# Altium PCB EmergencyIsolator.PcbDoc
Units mm, origin at the board's own origin, x right, y up, seen from the top; angles counter-clockwise.
Board outline 70 x 80 mm, 2 copper layers (Top Layer, Bottom Layer); 75 components, 75 nets, 274 pads, 29 vias.
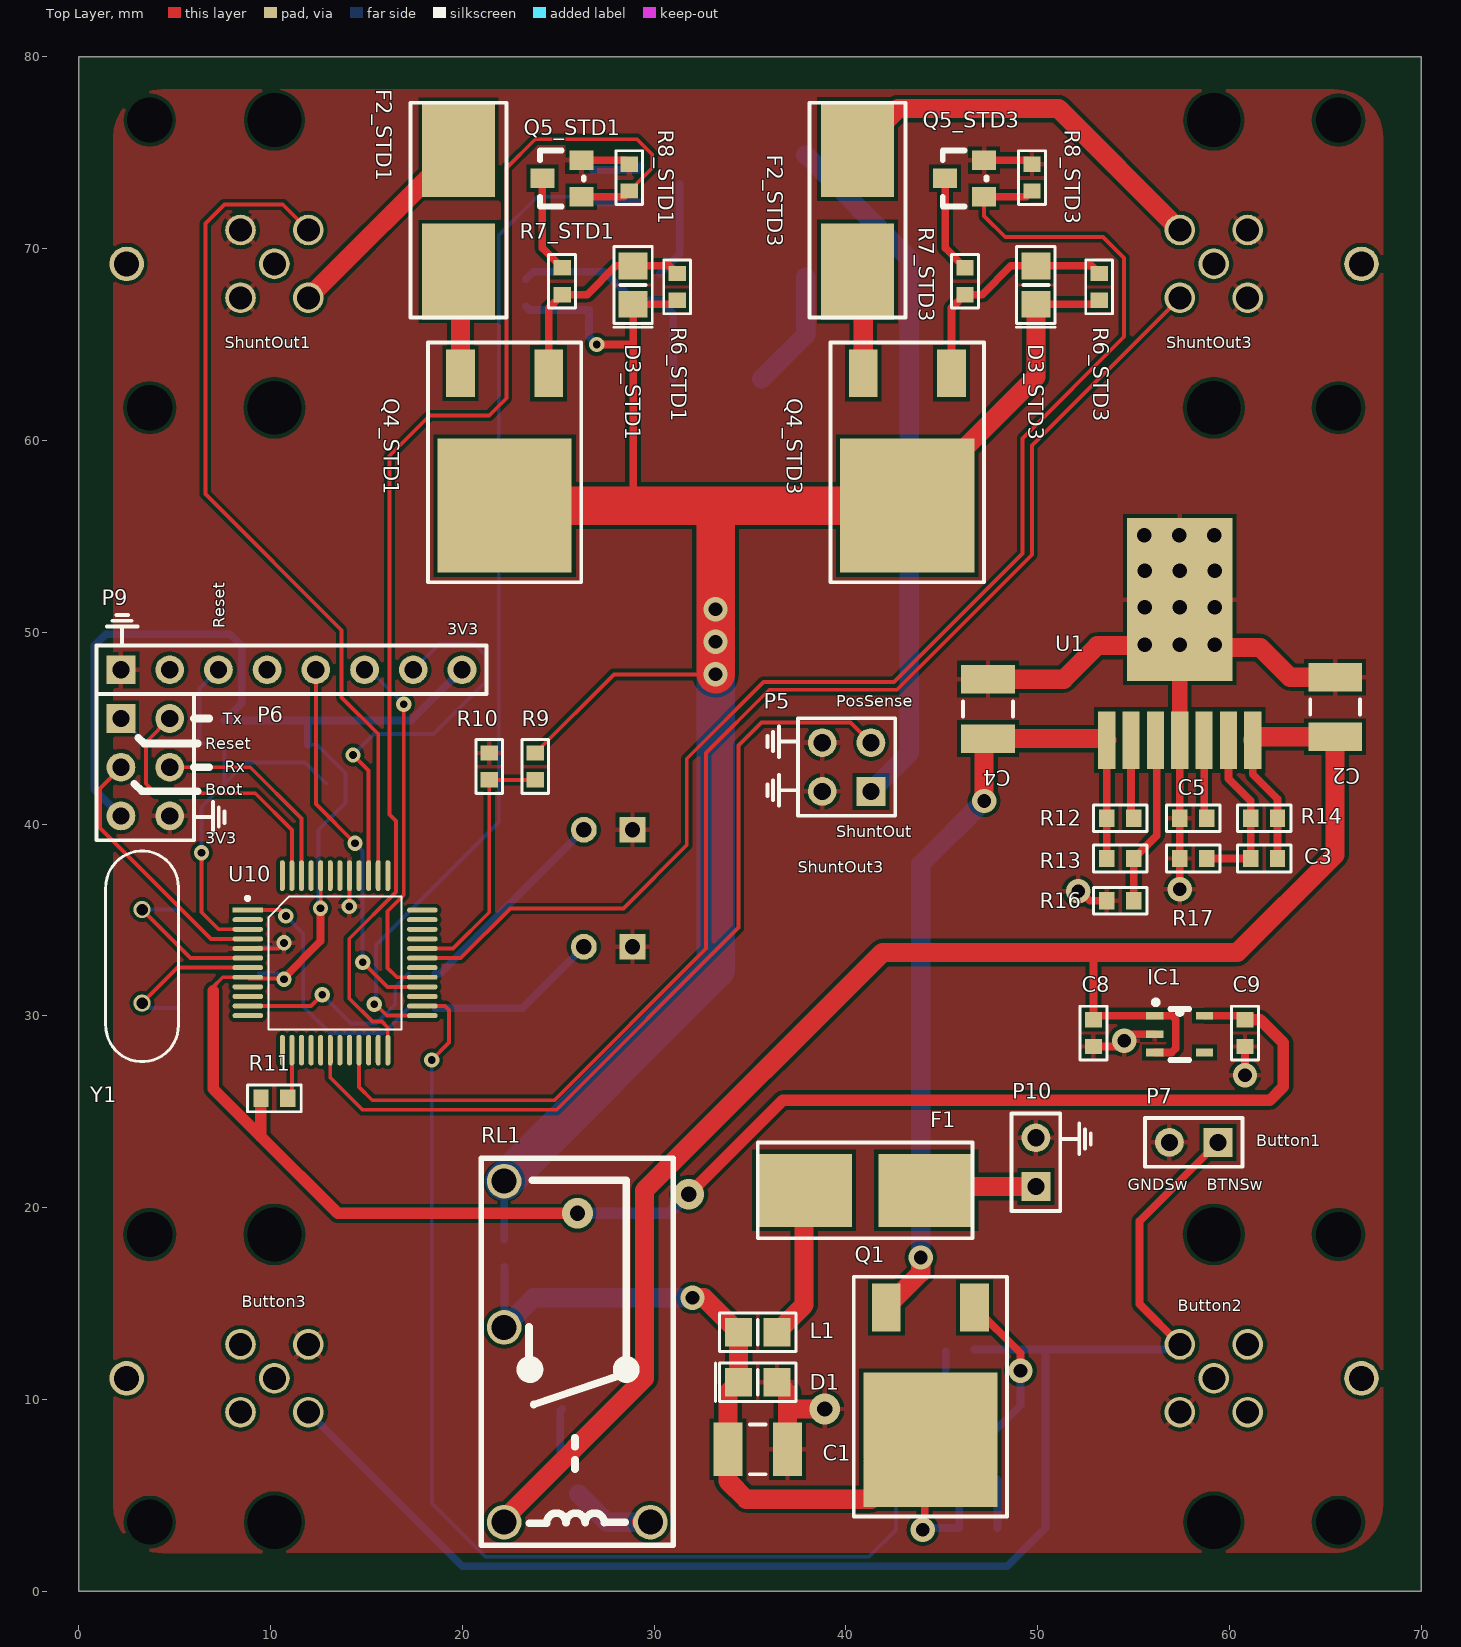
[diagram p0: Top Layer view]
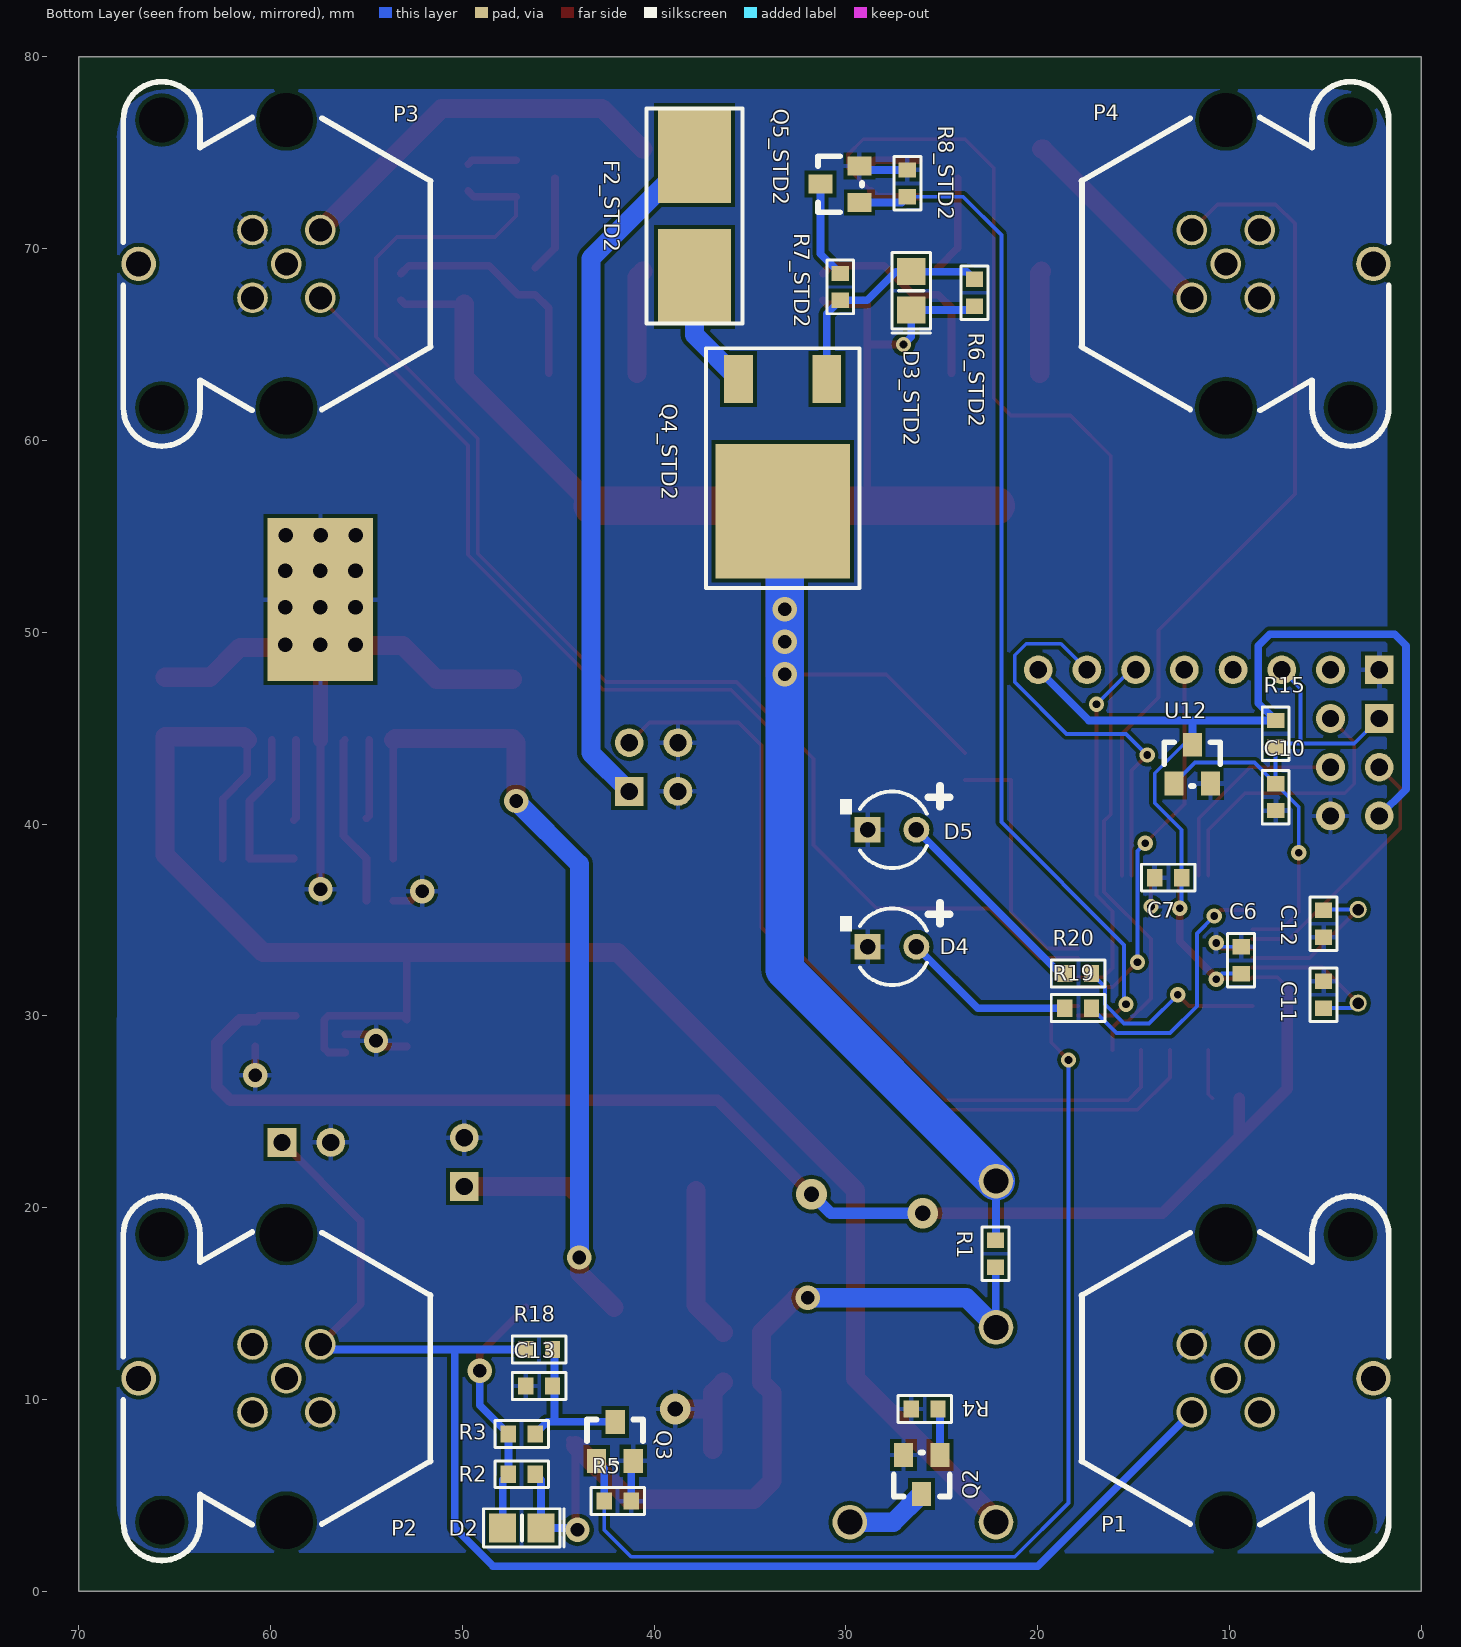
[diagram p1: Bottom Layer view, seen from below]
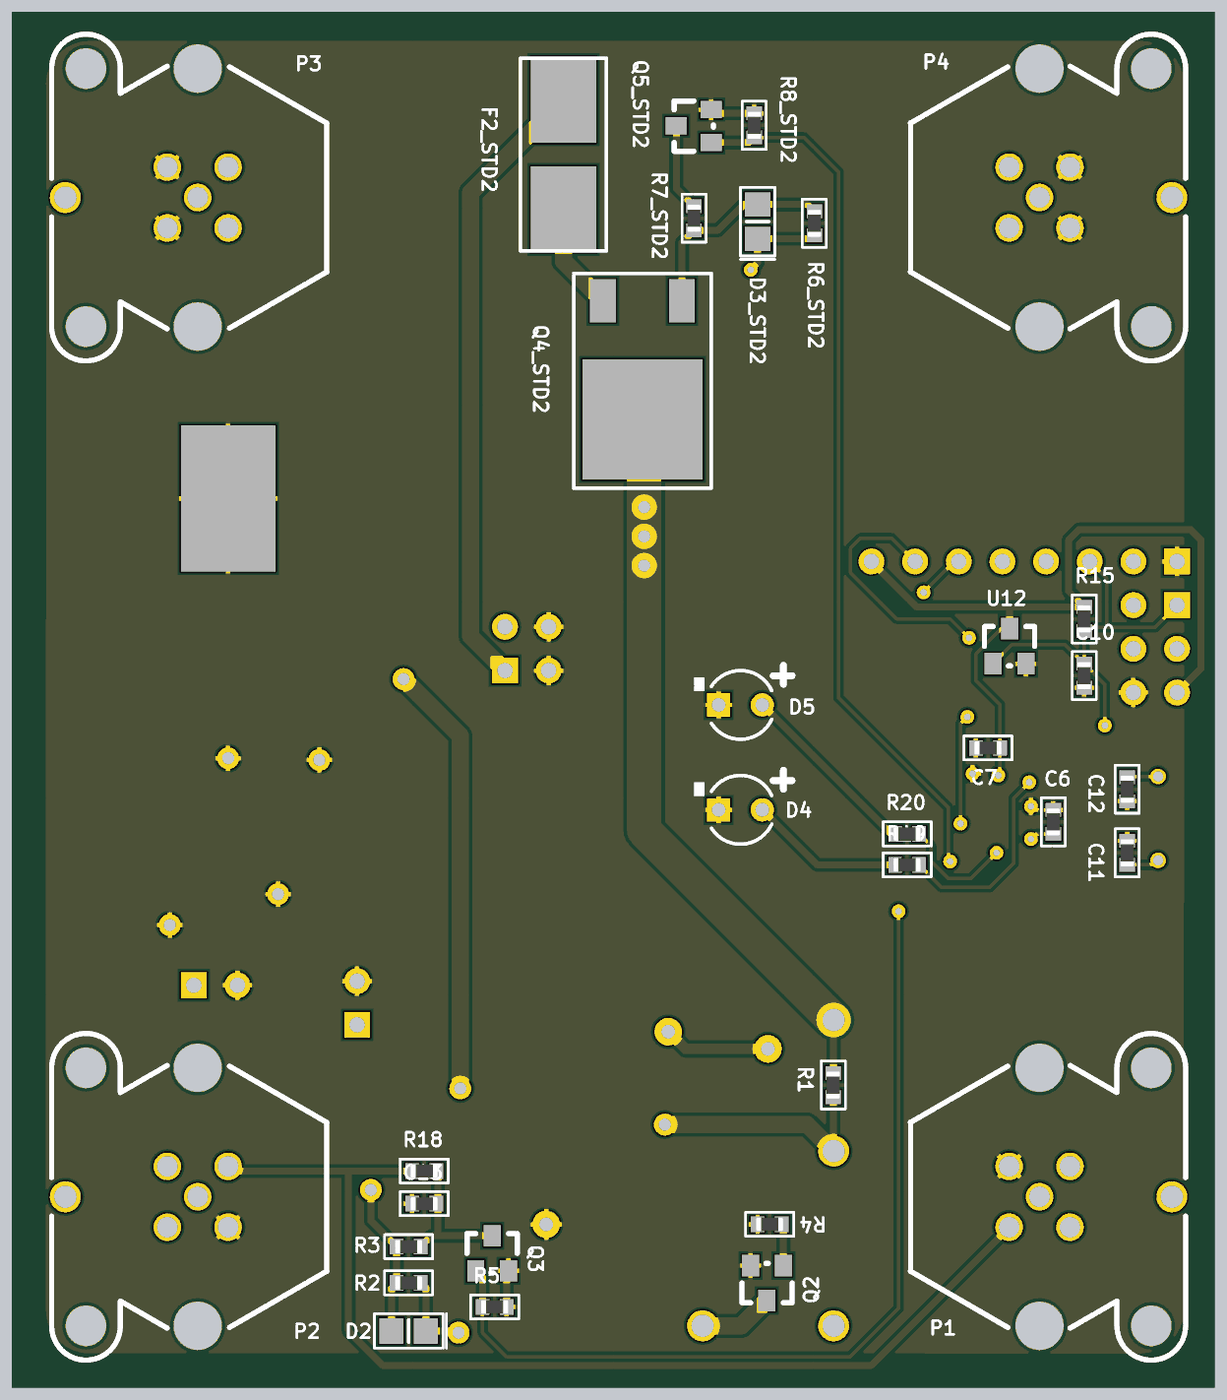
[diagram p2: 3D render of the assembled board from below, using the file's embedded part models]

## Layer stack, top to bottom
Top Layer: signal copper 0.0356
Dielectric: dielectric 0.32, FR-4, Dk 4.8
Bottom Layer: signal copper 0.0356

## Board outline
0,0 0,80 70,80 70,0

## Design rules (kind name [scope] priority, off if disabled: settings)
Clearance [All] p1: gap=0.2
PolygonConnect [All] p1: connectstyle=Relief reliefconductorwidth=0.254 reliefentries=4 polygonreliefangle="90 Angle"
RoomDefinition STD3 [InComponentClass('STD3')] p1 off: confinementstyle=ConfineIn formatcopy=TRUE lockcomponents=FALSE outline -77.9,-40 -27.1,-40 -27.1,-14.6 -77.9,-14.6
RoomDefinition STD2 [InComponentClass('STD2')] p2 off: confinementstyle=ConfineIn formatcopy=TRUE lockcomponents=FALSE outline -77.9,-40 -27.1,-40 -27.1,-14.6 -77.9,-14.6
RoomDefinition STD1 [InComponentClass('STD1')] p3 off: confinementstyle=ConfineIn formatcopy=TRUE lockcomponents=FALSE outline -77.9,-40 -27.1,-40 -27.1,-14.6 -77.9,-14.6
RoomDefinition PowerSupply [InComponentClass('PowerSupply')] p4 off: confinementstyle=ConfineIn formatcopy=TRUE lockcomponents=FALSE outline -70.9,-25 -20.1,-25 -20.1,0.4 -70.9,0.4
RoomDefinition Microcontroller [InComponentClass('Microcontroller')] p5 off: confinementstyle=ConfineIn formatcopy=TRUE lockcomponents=FALSE outline -70.9,-25 -20.1,-25 -20.1,0.4 -70.9,0.4
RoomDefinition IsolatorTop [InComponentClass('IsolatorTop')] p6 off: confinementstyle=ConfineIn formatcopy=TRUE lockcomponents=FALSE outline -70.9,-25 -20.1,-25 -20.1,0.4 -70.9,0.4
RoomDefinition IsolatorPower [InComponentClass('IsolatorPower')] p7 off: confinementstyle=ConfineIn formatcopy=TRUE lockcomponents=FALSE outline -70.9,-25 -20.1,-25 -20.1,0.4 -70.9,0.4
RoutingVias [All] p1: holewidth=0.4 width=0.8 viastyle="Through Hole" minholewidth=0.2 minwidth=0.4 maxholewidth=1 maxwidth=1.6
SilkToSilkClearance [All] p1 off: silktosilkclearance=0.254
SilkscreenOverComponentPads [All] p1 off: minsilkscreentomaskgap=0.254
SolderMaskExpansion [All] p1: expansion=0.102
Width [All] p1: maxlimit=4 minlimit=0.2 preferedwidth=0.3
26 further rules are at their usual default settings.

## Classes and differential pairs
component class Microcontroller: C6 C7 C10 C11 C12 J10 P6 P9 R11 R15 U10 U12 Y1 Y10
net class SHUNTOUT[1..3]: SHUNTOUT1 SHUNTOUT2 SHUNTOUT3
net class SHUNTDRIVE[1..3]: SHUNTDRIVE1 SHUNTDRIVE2 SHUNTDRIVE3
component class PowerSupply: C2 C3 C4 C5 C8 C9 IC1 R12 R13 R14 R16 R17 U1
component class IsolatorTop: D4 D5 P3 P4 P5 R9 R10 R19 R20
component class IsolatorPower: C1 C13 D1 D2 F1 L1 P1 P2 P7 P10 Q1 Q2 Q3 R1 R2 R3 R4 R5 R18 RL1
component class STD1: D3_STD1 F2_STD1 Q4_STD1 Q5_STD1 R6_STD1 R7_STD1 R8_STD1
component class STD2: D3_STD2 F2_STD2 Q4_STD2 Q5_STD2 R6_STD2 R7_STD2 R8_STD2
component class STD3: D3_STD3 F2_STD3 Q4_STD3 Q5_STD3 R6_STD3 R7_STD3 R8_STD3
channel class ShuntTripDriver: STD1 STD2 STD3

## Components (designator, comment, footprint, x,y, rotation, side; value= is the part's Value field where it differs from the comment)
C1 "C" 1210_M 35.4,7.4 r0 top
C2 "C" 1210_M 65.5,46.1 r90 top
C3 "C" 0603_M 61.8,38.2 r0 top
C4 "C" 1210_M 47.4,46 r90 top
C5 "C" 0603_M 58.1,40.3 r180 top
C6 "C" 0603_M 9.4,32.9 r90 bottom
C7 "C" 0603_M 13.2,37.2 r0 bottom
C8 "C" 0603_M 52.9,29.1 r270 top
C9 "C" 0603_M 60.8,29.1 r270 top
C10 "C" 0603_M 7.6,41.4 r270 bottom
C11 "C" 0603_M 5.1,31.1 r270 bottom
C12 "C" 0603_M 5.1,34.8 r270 bottom
C13 "C" 0603_M 46,10.7 r0 bottom
D1 "" 0805_M_POL 35.4,10.9 r180 top
D2 "" 0805_M_POL 46.9,3.3 r180 bottom
D3_STD1 "" 0805_M_POL 28.9,68.1 r270 top (schematic designator D3)
D3_STD2 "" 0805_M_POL 26.6,67.8 r270 bottom (schematic designator D3)
D3_STD3 "" 0805_M_POL 49.9,68.1 r270 top (schematic designator D3)
D4 "LED" CAP_0.1_POL 27.6,33.6 r180 bottom
D5 "LED" CAP_0.1_POL 27.6,39.7 r180 bottom
F1 "10A Fuse" LITTELFUSE-154 41,20.9 r180 top
F2_STD1 "5A Fuse" LITTELFUSE-154 19.8,72 r90 top (schematic designator F2)
F2_STD2 "5A Fuse" LITTELFUSE-154 37.9,71.7 r90 bottom (schematic designator F2)
F2_STD3 "5A Fuse" LITTELFUSE-154 40.6,72 r90 top (schematic designator F2)
IC1 "3.3V Regulator" SOT23-5 56.1,30 r270 top
L1 "value" 0805_M 35.4,13.5 r180 top
P1 "M12 Connector" M12_5P_VERT 10.2,11.1 r90 bottom
P2 "M12 Connector" M12_5P_VERT 59.175,11.1 r270 bottom
P3 "M12 Connector" M12_5P_VERT 59.175,69.2 r270 bottom
P4 "M12 Connector" M12_5P_VERT 10.2,69.2 r90 bottom
P5 "Header 2X2" HDR2X2 41.3,41.7 r90 top
P6 "Header 3X2" HDR2X3 2.2,45.5 r270 top
P7 "Header 2" HDR1X2 59.4,23.4 r180 top
P9 "Header 8" HDR1X8 2.2,48.04 r0 top
P10 "Header 2" HDR1X2 49.9,21.1 r90 top
Q1 "PFET 40V 10A" "TO-252 (D-Pak)" 44.4,7.9 r180 top
Q2 "50V N-Fet" SOT23-3 25.1,7.1 r0 bottom
Q3 "NFET 30V 5A" SOT23-3 43,6.8 r180 bottom
Q4_STD1 "PFET 40V 10A" "TO-252 (D-Pak)" 22.2,56.6 r180 top (schematic designator Q4)
Q4_STD2 "PFET 40V 10A" "TO-252 (D-Pak)" 33.3,56.3 r0 bottom (schematic designator Q4)
Q4_STD3 "PFET 40V 10A" "TO-252 (D-Pak)" 43.2,56.6 r180 top (schematic designator Q4)
Q5_STD1 "NFET 30V 5A" SOT23-3 26.2,72.7 r90 top (schematic designator Q5)
Q5_STD2 "NFET 30V 5A" SOT23-3 29.3,72.4 r90 bottom (schematic designator Q5)
Q5_STD3 "NFET 30V 5A" SOT23-3 47.2,72.7 r90 top (schematic designator Q5)
R1 "R" 0603_M 22.2,17.6 r270 bottom
R2 "R" 0603_M 46.9,6.1 r180 bottom
R3 "R" 0603_M 46.9,8.2 r0 bottom
R4 "R" 0603_M 25.9,9.5 r180 bottom
R5 "R" 0603_M 41.9,4.7 r0 bottom
R6_STD1 "R" 0603_M 31.2,68 r270 top (schematic designator R6)
R6_STD2 "R" 0603_M 23.3,67.7 r270 bottom (schematic designator R6)
R6_STD3 "R" 0603_M 53.2,68 r270 top (schematic designator R6)
R7_STD1 "R" 0603_M 25.2,68.3 r270 top (schematic designator R7)
R7_STD2 "R" 0603_M 30.3,68 r270 bottom (schematic designator R7)
R7_STD3 "R" 0603_M 46.2,68.3 r270 top (schematic designator R7)
R8_STD1 "R" 0603_M 28.7,73.7 r270 top (schematic designator R8)
R8_STD2 "R" 0603_M 26.8,73.4 r270 bottom (schematic designator R8)
R8_STD3 "R" 0603_M 49.7,73.7 r270 top (schematic designator R8)
R9 "R" 0603_M 23.8,43 r270 top
R10 "R" 0603_M 21.4,43 r90 top
R11 "R" 0603_M 10.2,25.7 r180 top
R12 "R" 0603_M 54.3,40.3 r180 top
R13 "R" 0603_M 54.3,38.2 r180 top
R14 "R" 0603_M 61.8,40.3 r0 top
R15 "R" 0603_M 7.6,44.7 r90 bottom
R16 "R" 0603_M 54.3,36 r0 top
R17 "R" 0603_M 58.1,38.2 r0 top
R18 "R" 0603_M 46,12.6 r0 bottom
R19 "R" 0603_M 17.9,30.4 r180 bottom
R20 "R" 0603_M 17.9,32.2 r180 bottom
RL1 "Relay" RELAY_G5Q_4PIN 29.8,3.6 r90 top
U1 "LMZ12001" LMZ12001 57.4,44.4 r0 top
U10 "LPC11C14" QFP48 8.8,35.5 r0 top
U12 "XC61CN2002MR" SOT23-3 12.9,42.1 r180 bottom
Y1 "XTAL-16MHz" XTAL_TH_4.88MM 3.3,33.1 r270 top

## Footprints (in the part's own frame and the unit in brackets; to place one, negate y for a bottom-side part, rotate by r counter-clockwise, add the part's x,y. Pads: shape width x height; smd on the part's side, far side on the other; paste and mask are expansions set on the pad)
0603_M [mm] "Passive Component, Body 1.6x0.8mm, IPC Low Density"
  rect 0.8x0.9 smd: 1(-0.7,0) 2(0.7,0)
  silkscreen extent -1.4,-0.7 1.4,0.7, body extent -0.8,-0.4 0.8,0.4, height 0.9
0805_M [mm] "Passive Component, Body 2.0x1.2mm, IPC Low Density"
  rect 1.4x1.5 smd: 1(-1,0) 2(1,0)
  silkscreen extent -2,-1 2,1, body extent -1,-0.62 1,0.62, height 1.2
0805_M_POL [mm] "Passive Component, Body 2.0x1.2mm, IPC Low Density, polarised"
  rect 1.4x1.5 smd: 1(-1,0) 2(1,0)
  silkscreen extent -2,-1 2.2,1, body extent -1.07,-0.7 1.07,0.7, height 0.7
1210_M [mm] "Chip Capacitor, Body 3.2x2.5mm, IPC Low Density"
  rect 1.5x2.8 smd: 1(-1.55,0) 2(1.55,0)
  silkscreen extent -0.4,-1.3 0.4,1.3, body extent -1.7,-1.35 1.7,1.35, height 1.5
CAP_0.1_POL [mm] "Capacitor; 2 Leads, 0.1\" spacing, polarisation marker"
  round 1.35 hole 0.8: 1(1.27,0)
  rect 1.35x1.35 hole 0.8: 2(-1.27,0)
  silkscreen extent -2.65,-2 1.82,2
HDR1X2 [mm] "Connector; Header; 2 Position"
  rect 1.5x1.5 hole 0.9: 1(0,0)
  round 1.5 hole 0.9: 2(2.54,0)
  silkscreen extent -1.27,-1.27 3.81,1.27
HDR1X8 [mm] "Connector; Header; 8 Position"
  rect 1.5x1.5 hole 0.9: 1(0,0)
  round 1.5 hole 0.9: 2(2.54,0) 3(5.08,0) 4(7.62,0) 5(10.16,0) 6(12.7,0) 7(15.24,0) 8(17.78,0)
  silkscreen extent -1.27,-1.27 19.05,1.27
HDR2X2 [mm] "Connector; Header; 2x2 Position"
  rect 1.5x1.5 hole 0.9: 1(0,0)
  round 1.5 hole 0.9: 2(0,2.54) 3(2.54,0) 4(2.54,2.54)
  silkscreen extent -1.27,-1.27 3.81,3.81
HDR2X3 [mm] "Connector; Header; 3x2 Position"
  rect 1.5x1.5 hole 0.9: 1(0,0)
  round 1.5 hole 0.9: 2(0,2.54) 3(2.54,0) 4(2.54,2.54) 5(5.08,0) 6(5.08,2.54)
  silkscreen extent -1.27,-1.27 6.35,3.81
LITTELFUSE-154 [mm]
  rect 5x3.81 smd: 1(-3.185,0) 2(3.185,0)
  silkscreen extent -5.6,-2.51 5.6,2.5
LMZ12001 [mm]
  rect 0.9x3 smd: 1(-3.81,-0.025) 2(-2.54,-0.025) 3(-1.27,-0.025) 4(0,-0.025) 5(1.27,-0.025) 6(2.54,-0.025) 7(3.81,-0.025)
  round 1.524 hole 0.762: 8(-1.85,10.65) 8(-1.825,4.95) 8(-1.825,6.9) 8(-1.825,8.8) 8(-0.025,10.65) 8(0,4.95) 8(0,6.9) 8(0,8.8) 8(1.8,10.65) 8(1.825,4.95) 8(1.825,6.9) 8(1.825,8.8)
  rect 5.5x8.5 smd: 8(0,7.3)
  rect 5.5x8.5 smd far side: 8(0,7.3)
M12_5P_VERT [mm] "M12 Connector Vertical"
  round 0 hole 2.35: 0(-7.5,-6.5) 0(7.5,-6.5)
  round 0 hole 2.8: 0(-7.5,0) 0(7.5,0)
  round 1.6 hole 1.2: 1(-1.768,1.768) 2(1.768,1.768) 3(1.768,-1.768) 4(-1.768,-1.768) 5(0,0)
  round 1.8 hole 1.3: S(0,-7.7)
  silkscreen extent -9.5,-8.5 9.5,7.52
QFP48 [mm]
  rect 1.6x0.26 smd: 1(0.013,0.01)
  oval 1.6x0.26 smd: 2(0.013,-0.49) 3(0.013,-0.99) 4(0.013,-1.49) 5(0.013,-1.99) 6(0.013,-2.49) 7(0.013,-2.99) 8(0.013,-3.49) 9(0.013,-3.99) 10(0.013,-4.49) 11(0.013,-4.99) 12(0.013,-5.49) 25(9.113,-5.49) 26(9.113,-4.99) 27(9.113,-4.49) 28(9.113,-3.99) 29(9.113,-3.49) 30(9.113,-2.99) 31(9.113,-2.49) 32(9.113,-1.99) 33(9.113,-1.49) 34(9.113,-0.99) 35(9.113,-0.49) 36(9.113,0.01)
  oval 0.26x1.6 smd: 13(1.813,-7.29) 14(2.313,-7.29) 15(2.813,-7.29) 16(3.313,-7.29) 17(3.813,-7.29) 18(4.313,-7.29) 19(4.813,-7.29) 20(5.313,-7.29) 21(5.813,-7.29) 22(6.313,-7.29) 23(6.813,-7.29) 24(7.313,-7.29) 37(7.313,1.81) 38(6.813,1.81) 39(6.313,1.81) 40(5.813,1.81) 41(5.313,1.81) 42(4.813,1.81) 43(4.313,1.81) 44(3.813,1.81) 45(3.313,1.81) 46(2.813,1.81) 47(2.313,1.81) 48(1.813,1.81)
  silkscreen extent -0.04,-6.2 8.03,0.73
RELAY_G5Q_4PIN [mm]
  round 1.8 hole 1.3: 1(0,7.62) 2(10.16,7.62) 3(17.78,7.62) 5(0,0)
  silkscreen extent -1.2,-1.2 18.98,8.82
SOT23-3 [mm]
  rect 1x1.25 smd: 1(0,0) 2(1.905,0) 3(0.965,2.032)
  silkscreen extent -0.51,-0.13 2.41,2.16
SOT23-5 [mm]
  rect 0.4x0.9 smd: 1(0,0) 2(0.953,0) 3(1.91,0) 4(1.91,2.59) 5(0,2.59)
  silkscreen extent -0.8,-0.05 2.3,1.8
"TO-252 (D-Pak)" [mm]
  rect 7x7 smd: 1(0,0)
  rect 1.5x2.5 smd: 2(-2.3,-6.9) 3(2.3,-6.9)
  silkscreen extent -4,-8.5 4,4
XTAL_TH_4.88MM [mm]
  round 0.9 hole 0.6: 1(-2.44,0) 2(2.44,0)
  silkscreen extent -5.49,-1.9 5.49,1.9

## Part data
C1 C2 C3 C4 C5 C6 C7 C8 C9 C10 C11 C12 C13: "Default Capacitor"
D1 D2 D3_STD1 D3_STD2 D3_STD3: library part "D Zener", "Zener Diode"
D4 D5: library part "D LED"
F1 F2_STD1 F2_STD2 F2_STD3: library part FUSE, "Fuse"
IC1: library part MIC5259-3.3, "3.3V regulator"
L1: library part L, "Inductor"
P1 P2 P3 P4: "5 Pin"
P5: "Header, 2-Pin, Dual row"
P6: "Header, 3-Pin, Dual row"
P7 P10: "Header, 2-Pin"
P9: "Header, 8-Pin"
Q1 Q4_STD1 Q4_STD2 Q4_STD3: "10A 40V"
Q2: library part ZXM61N02F, "1.7A, 20V N-Channel Enhancement mode FET"
R1 R2 R3 R4 R5 R6_STD1 R6_STD2 R6_STD3 R7_STD1 R7_STD2 R7_STD3 R8_STD1 R8_STD2 R8_STD3 R9 R10 R11 R12 R13 R14 R15 R16 R17 R18 R19 R20: "Resistor"
RL1: "10A 30VDC Max Normally Open"
U1: "Switching Regulator"
U10: library part LPC11C14_Full, "NXP LPC11C14 Microcontroller"
U12: library part XC61F, "SOT23 reset generator"
Y1: "Crystal Oscillator"

## Via types
v1: diameter 0.8, hole 0.4, Top Layer to Bottom Layer, 14 vias
v2: diameter 1.27, hole 0.711, Top Layer to Bottom Layer, 12 vias
v3: diameter 1.6, hole 0.8, Top Layer to Bottom Layer, 3 vias

## Nets (pads, with @x,y where several pads share a name; then routed paths per layer and width w, separated by ;. In a path a pad name is that pad's centre, name@x,y a point inside that pad or via, vN(x,y) a via of type N, cw(c..) or ccw(c..) an arc to the next point about the centre after c; other vN are vias at no path point)
3V3: C6.1 C7.1 C9.1 IC1.5 P6.5 P9.8 R11.2 R15.2 U10.8 U10.44 U12.3 | length 134
  Top Layer w0.2: 7,31.3 7,31.5 7.51,32.01 U10.8 8.883,31.94 10.66,31.94 v1(10.7,31.9) ; v1(12.6,35.6) 12.613,35.613 U10.44
  Top Layer w0.4: v1@10.66,31.94 12.6,33.881 v1(12.6,35.6) ; IC1.5 60.6,30 C9.1
  Top Layer w0.6: 7,31.3 7,26.2 9.5,23.7 ; R11.2 9.5,23.7 ; v3(26,19.7) 13.5,19.7 9.5,23.7 ; v3(31.8,20.7) 36.7,25.6 62.1,25.6 62.8,26.3 62.8,28.6 61.6,29.8 C9.1
  Bottom Layer w0.2: C6.1 10.4,32.2 v1(10.7,31.9) ; U12.3 12.417,44.132 13.9,42.649 13.9,41.1 12.5,39.7 C7.1 12.5,35.7 v1(12.6,35.6)
  Bottom Layer w0.4: P6.5 0.8,41.82 0.8,49.3 1.4,49.9 7.9,49.9 8.5,49.3 8.5,46.3 R15.2 11.9,45.4 ; U12.3 11.935,45.365 11.9,45.4 ; P9.8 17.34,45.4 11.9,45.4
  Bottom Layer w0.6: v3(26,19.7) 30.8,19.7 v3(31.8,20.7)
6S_FILTERED: C1.1 D1.2 D2.2 L1.2 Q1.1 R1.2 R2.2 RL1.2 | length 46.2
  Top Layer w0.4: v2(44,3.2) 44.1,3.3 44.1,7.6 Q1.1
  Top Layer w1: v2(32,15.3) 32.6,15.3 L1.2 D1.2 33.85,10.35 C1.1 33.85,5.75 34.8,4.8 41.3,4.8 Q1.1@44.1,7.6
  Bottom Layer w0.4: RL1.2@22.2,13.78 R1.2 ; v2(44,3.2) 44.1,3.3 D2.2 45.9,5.8 R2.2
  Bottom Layer w1: RL1.2 22.2,13.78 23.72,15.3 v2(32,15.3)
6S_POWERENABLE: P1.1 P2.1 P7.1 R18.2 | length 75.8
  Top Layer w0.4: P2.1 55.3,14.975 55.3,19.3 P7.1
  Bottom Layer w0.4: P1.1 20,1.3 48.4,1.3 50.4,3.3 50.4,12.6 ; R18.2 50.4,12.6 ; P2.1 57.139,12.6 50.4,12.6
6S_POWERENABLE_FILTERED: C13.1 Q3.3 R3.1 R18.1 | length 8.1
  Bottom Layer w0.4: Q3.3 45.2,8.832 ; R18.1@45.2,12.5 45.2,8.832 ; R3.1 45.568,8.832 45.2,8.832
6S_POWERLATCH: Q3.1 R5.2 U10.26 | length 57.3
  Top Layer w0.2: U10.26 19.09,30.51 19.3,30.3 19.3,28.6 v1(18.4,27.7)
  Bottom Layer w0.2: v1(18.4,27.7) 18.4,4.6 21.2,1.8 41.2,1.8 42.6,3.2 R5.2
  Bottom Layer w0.4: R5.2 42.6,6.4 Q3.1
6S_SHUNTSUPPLY: D3_STD1.2 D3_STD2.2 D3_STD3.2 Q4_STD1.1 Q4_STD2.1 Q4_STD3.1 R1.1 R6_STD1.2 R6_STD2.2 R6_STD3.2 R9.1 RL1.3 | length 120.8
  Top Layer w0.2: R9.1 27.9,47.8 v2(33.2,47.8)
  Top Layer w0.4: v1(27,65) 28.9,65 ; 28.9,56.6 28.9,65 ; D3_STD1.2@29.1,67.3 D3_STD1.2 ; R6_STD1.2 31,67.1 D3_STD1.2 ; D3_STD3.2@50.1,67.3 D3_STD3.2 53,67.1 R6_STD3.2 ; 28.9,65 D3_STD1.2
  Top Layer w1: Q4_STD3.1 49.9,63.3 D3_STD3.2
  Top Layer w2: Q4_STD1.1 28.9,56.6 33.2,56.6 ; v2(33.2,47.8) v2(33.2,49.5) v2(33.2,51.2) 33.2,56.6 ; Q4_STD3.1 33.2,56.6
  Bottom Layer w0.4: R1.1@22.18,18.32 RL1.3 ; R6_STD2.2 23.5,66.8 D3_STD2.2 26.6,65.4 v1(27,65)
  Bottom Layer w2: RL1.3 33.2,32.4 v2(33.2,47.8) v2(33.2,49.5) v2(33.2,51.2) 33.2,56.2 Q4_STD2.1
6S_SWITCHED: C4.1 Q1.3 R12.2 R13.2 U1.1 | length 44.4
  Top Layer w0.4: U1.1@53.515,44.3 U1.1 53.6,44.365 R12.2 R13.2
  Top Layer w1: Q1.3 43.9,16.6 v2(43.9,17.4) ; v2(47.2,41.2) 47.2,44.25 C4.1 53.515,44.45 U1.1
  Bottom Layer w1: v2(43.9,17.4) 43.9,37.9 v2(47.2,41.2)
BATT_GND: C1.2 C2.2 C4.2 C5.2 C6.2 C7.2 C8.2 C9.2 C10.2 C11.1 C12.2 C13.2 D1.1 D4.2 D5.2 IC1.2 P1.2 P2.2 P3.3 P3.4 P4.3 P4.4 P5.2 P5.4 P6.6 P7.2 P9.1 P10.2 Q2.2 Q3.2 Q5_STD1.2 Q5_STD2.2 Q5_STD3.2 R4.1 R5.1 R8_STD1.1 R8_STD2.1 R8_STD3.1 R10.2 R16.1 R17.1 U1.4 U1.8 U10.5 U10.41 U12.2 | length 64.4
  Top Layer w0.2: U10.5 10.41,33.51 v1(10.7,33.8) ; v1(14.1,35.7) 14.113,35.713 U10.41
  Top Layer w0.4: Q5_STD1.2 28.495,74.605 R8_STD1.1 ; Q5_STD3.2 49.495,74.605 R8_STD3.1 ; v2(52.1,36.5) 52.2,36.5 52.7,36 R16.1 ; C8.2 54.2,28.4 v2(54.5,28.7) 54.847,29.047 IC1.2 ; v2(57.4,36.6) 57.3,36.5 57.2,36.5 57.4,36.7 R17.1 C5.2@57.4,40.2 ; C5.2 C5.2@57.4,40.2 ; U1.4 C5.2@57.4,40.2 ; v2(60.8,26.9) C9.2
  Top Layer w0.8: U1.4 U1.8@57.4,51.7
  Top Layer w1: D1.1 36.95,10.35 36.95,9.5 ; C1.2 36.95,9.5 ; v3(38.9,9.5) 36.95,9.5 ; C4.2 51.35,47.55 53.1,49.3 55,49.3 57.4,51.7 58.512,50.588 59.9,49.2 61.6,49.2 63.15,47.65 C2.2
  Bottom Layer w0.2: C6.2 10.5,33.6 v1(10.7,33.8)
  Bottom Layer w0.4: R8_STD2.1 29.095,74.1 Q5_STD2.2 ; Q3.2 41.2,6.695 R5.1
CAN_RX: U10.19
CAN_TX: U10.20
EN: R13.1 R16.2 U1.3 | length 9.1
  Top Layer w0.4: R16.2 R13.1 ; R13.1@55,38 R13.1 ; U1.3 56.2,44.305 56.2,39.4 R13.1
LED1: R19.2 U10.1 | length 13.8
  Top Layer w0.2: U10.1 10.49,35.51 v1(10.8,35.2)
  Bottom Layer w0.2: v1(10.8,35.2) 11.7,34.3 11.7,30.5 13.1,29.1 15.9,29.1 R19.2
LED2: R20.2 U10.11 | length 10.9
  Top Layer w0.2: U10.11 12.11,30.51 v1(12.7,31.1)
  Bottom Layer w0.2: v1(12.7,31.1) 14.2,29.6 15.5,29.6 16.5,30.6 16.5,31.5 R20.2
NetC3_1: C3.1 R14.1 R17.2 U1.6 | length 8.9
  Top Layer w0.4: R17.2 C3.1 R14.1@61.1,40.2 ; U1.6 59.94,42.36 61.1,41.2 R14.1
NetC5_1: C5.1 U1.5 | length 4.2
  Top Layer w0.4: U1.5 58.67,40.33 C5.1@58.8,40.2
NetD2_1: D2.1 Q1.2 R2.1 R3.2 | length 13.2
  Top Layer w0.4: Q1.2 49.1,12.4 v2(49.1,11.5)
  Bottom Layer w0.4: D2.1 47.9,5.8 R2.1 R3.2 49.1,9.7 v2(49.1,11.5)
NetD3_STD1_1: D3_STD1.1 Q4_STD1.2 R6_STD1.1 R7_STD1.2 | length 11.2
  Top Layer w0.4: Q4_STD1.2 24.5,66.9 R7_STD1.2 26.5,67.6 28,69.1 D3_STD1.1 30.8,69.1 R6_STD1.1
NetD3_STD2_1: D3_STD2.1 Q4_STD2.2 R6_STD2.1 R7_STD2.2 | length 12.2
  Bottom Layer w0.4: R6_STD2.1 23.7,68.8 D3_STD2.1 27.4,68.8 28.9,67.3 R7_STD2.2 31,66.6 Q4_STD2.2
NetD3_STD3_1: D3_STD3.1 Q4_STD3.2 R6_STD3.1 R7_STD3.2 | length 12.2
  Top Layer w0.4: Q4_STD3.2 45.5,66.9 R7_STD3.2 47.1,67.6 48.6,69.1 D3_STD3.1 52.8,69.1 R6_STD3.1
NetD4_1: D4.1 R19.1 | length 9.1
  Bottom Layer w0.4: R19.1 23.13,30.4 D4.1
NetD5_1: D5.1 R20.1 | length 10.8
  Bottom Layer w0.4: R20.1 18.83,32.2 D5.1
NetF1_1: F1.1 P10.1 | length 5.8
  Top Layer w1: F1.1 44.385,21.1 P10.1
NetF1_2: F1.2 L1.1 | length 8
  Top Layer w1: L1.1 37.815,14.915 F1.2
NetF2_STD1_1: F2_STD1.1 Q4_STD1.3 | length 5.4
  Top Layer w1: F2_STD1.1 19.9,68.715 Q4_STD1.3
NetF2_STD2_1: F2_STD2.1 Q4_STD2.3 | length 6.3
  Bottom Layer w1: Q4_STD2.3 37.9,65.5 F2_STD2.1
NetF2_STD3_1: F2_STD3.1 Q4_STD3.3 | length 5.4
  Top Layer w1: F2_STD3.1 40.9,68.515 Q4_STD3.3
NetQ2_1: Q2.1 R4.2 | length 2.4
  Bottom Layer w0.4: Q2.1 25.1,9.4 R4.2
NetQ2_3: Q2.3 RL1.5 | length 4.8
  Top Layer w1: RL1.5@29.333,3.6 RL1.5
  Bottom Layer w1: Q2.3 27.533,3.6 RL1.5
NetQ5_STD1_3: Q5_STD1.3 R7_STD1.1 | length 5.1
  Top Layer w0.4: Q5_STD1.3 24.168,70.032 R7_STD1.1
NetQ5_STD2_3: Q5_STD2.3 R7_STD2.1 | length 5.1
  Bottom Layer w0.4: R7_STD2.1 31.332,69.732 Q5_STD2.3
NetQ5_STD3_3: Q5_STD3.3 R7_STD3.1 | length 5.1
  Top Layer w0.4: Q5_STD3.3 45.168,70.032 R7_STD3.1
NetR12_1: R12.1 U1.2 | length 4.1
  Top Layer w0.4: U1.2 54.86,40.44 R12.1
"PIO 0.1/CLKOUT": P6.3 U10.4 | length 13.7
  Top Layer w0.2: P6.3 1.1,41.86 1.1,39.8 6.89,34.01 U10.4
"PIO 0.2/SSEL0": U10.10
"PIO 0.3": R11.1 U10.14 | length 2.6
  Top Layer w0.2: R11.1 11.113,25.913 U10.14
"PIO 0.4/SCL": U10.15
"PIO 0.5/SDA": U10.16
"PIO 0.6": U10.22
"PIO 0.7": U10.23
"PIO 0.8/MISO0": U10.27
"PIO 0.9/MOSI0": P9.5 U10.28 | length 19.9
  Top Layer w0.2: P9.5 12.36,41.04 v1(14.4,39) ; v1(14.8,32.8) 16.09,31.51 U10.28
  Bottom Layer w0.2: v1(14.4,39) 14.8,38.6 v1(14.8,32.8)
"PIO 0.10/SCK0": P9.6 U10.29 | length 18.9
  Top Layer w0.2: v1(16.943,46.243) 16.943,36.297 16.1,35.454 16.1,32.5 16.59,32.01 U10.29
  Bottom Layer w0.2: P9.6 15.145,48.04 v1(16.943,46.243)
"PIO 0.11/ADC0": R9.2 R10.1 U10.32 | length 13.6
  Top Layer w0.2: U10.32 19.51,33.51 21.4,35.4 R10.1 R9.2
"PIO 1.0/ADC1": U10.33
"PIO 1.1/ADC2": U10.34
"PIO 1.2/ADC3": U10.35
"PIO 1.3/ADC4": P9.7 U10.39 | length 21.1
  Top Layer w0.2: v1(14.3,43.6) 15.113,42.787 U10.39
  Bottom Layer w0.2: v1(14.3,43.6) 15.4,44.7 18.5,44.7 21.2,47.4 21.2,48.8 20.6,49.4 18.8,49.4 P9.7
"PIO 1.4/ADC5/WAKEUP": U10.40
"PIO 1.5": U10.45
"PIO 1.6/RX": P6.4 U10.46 | length 11
  Top Layer w0.2: P6.4 8.94,42.96 11.613,40.287 U10.46
"PIO 1.7/TX": P6.2 U10.47 | length 14.9
  Top Layer w0.2: P6.2 3.5,44.26 3.5,42.1 4,41.6 9.2,41.6 11.113,39.687 U10.47
"PIO 1.8": U10.9
"PIO 1.9": U10.17
"PIO 1.10/ADC6": U10.30
"PIO 1.11/ADC7": U10.42
"PIO 2.0/SSEL1": U10.2
"PIO 2.1/SCK1": U10.13
"PIO 2.3/MOSI1": P4.2 U10.38 | length 44.1
  Top Layer w0.2: P4.2 10.636,72.3 7.6,72.3 6.6,71.3 6.6,57.2 13.7,50.1 13.7,46.6 15.613,44.687 U10.38
"PIO 2.4": P5.3 U10.18 | length 44.7
  Top Layer w0.2: U10.18 13.113,26.787 14.8,25.1 24.9,25.1 34.4,34.6 34.4,44.1 35.6,45.3 40.24,45.3 P5.3
"PIO 2.5": P3.2 U10.21 | length 71.6
  Top Layer w0.2: U10.21 14.613,26.287 15.3,25.6 24.8,25.6 32.7,33.5 32.7,43.7 36,47 42.666,47 49.7,54.034 49.7,59.725 P3.2
"PIO 2.8": U10.12
"PIO 3.0": U10.36
"PIO 3.1": U10.37
"PIO 3.2": U10.43
"PIO 3.3": U10.48
R\E\S\E\T\: C10.1 P6.1 P9.3 R15.1 U10.3 U12.1 | length 28.4
  Top Layer w0.2: v1(6.4,38.5) 6.4,35.4 7.29,34.51 U10.3
  Bottom Layer w0.2: P6.1 3.5,44.2 6.3,44.2 ; v1(6.4,38.5) 6.4,40.9 C10.1 ; P9.3 6.3,47.06 6.3,44.2 ; U12.1 11.8,43.2 8.7,43.2 C10.1 ; 6.3,44.2 7.4,44.2 R15.1 C10.1
SHUNTDRIVE1: Q5_STD1.1 R8_STD1.2 U10.24 | length 66.2
  Top Layer w0.2: U10.24 16.113,29.387 15.8,29.7 15.31,29.7 14.1,30.91 14.1,34.02 16.543,36.462 16.543,40.157 16.2,40.5 16.2,59.2 18.3,61.3 21.4,61.3 22.3,62.2 22.3,74.2 23.8,75.7 29.1,75.7 29.9,74.9 29.9,74.2 R8_STD1.2
  Top Layer w0.4: Q5_STD1.1 28.4,72.7 R8_STD1.2
SHUNTDRIVE2: Q5_STD2.1 R8_STD2.2 U10.25 | length 53.9
  Top Layer w0.2: v1(15.4,30.6) 15.466,30.6 16.055,30.01 U10.25
  Bottom Layer w0.2: v1(15.4,30.6) 15.5,30.7 15.5,33.7 21.9,40.1 21.9,70.7 23.9,72.7 R8_STD2.2
  Bottom Layer w0.4: R8_STD2.2 27.1,72.4 Q5_STD2.1
SHUNTDRIVE3: Q5_STD3.1 R8_STD3.2 U10.31 | length 72.1
  Top Layer w0.2: U10.31 19.91,33.01 22.5,35.6 28.4,35.6 31.7,38.9 31.7,43.4 35.7,47.4 42.5,47.4 49.2,54.1 49.2,60.1 54.5,65.4 54.5,69.5 53.4,70.6 48.3,70.6 47.2,71.7 Q5_STD3.1
  Top Layer w0.4: Q5_STD3.1 49.4,72.7 R8_STD3.2
SHUNTOUT1: F2_STD1.2 P4.1 | length 11
  Top Layer w1: P4.1 19.721,75.185 F2_STD1.2
SHUNTOUT2: F2_STD2.2 P5.1 | length 36.3
  Bottom Layer w1: F2_STD2.2 43.3,69.485 43.3,43.7 P5.1
SHUNTOUT3: F2_STD3.2 P3.1 | length 20.3
  Top Layer w1: F2_STD3.2 42.715,77.3 51.075,77.3 P3.1
V5V: C2.1 C3.2 C8.1 IC1.1 IC1.3 R14.2 RL1.1 U1.7 | length 91.5
  Top Layer w0.4: 52.9,33.3 C8.1 53.1,30 IC1.1 57,30 57.2,29.8 57.2,28.3 56.99,28.09 IC1.3 ; U1.7 61.21,42.59 62.5,41.3 R14.2 C3.2
  Top Layer w1: RL1.1 22.18,3.78 29.5,11.1 29.5,20.9 41.9,33.3 52.9,33.3 60.4,33.3 65.5,38.4 C2.1 61.385,44.55 U1.7
XTALIN: C12.1 U10.6 Y1.1 | length 8.4
  Top Layer w0.2: Y1.1 5.83,33.01 U10.6
  Bottom Layer w0.2: Y1.1 5.06,35.54 C12.1
XTALOUT: C11.2 U10.7 Y1.2 | length 8.2
  Top Layer w0.2: Y1.2 5.15,32.51 U10.7
  Bottom Layer w0.2: Y1.2 3.56,30.4 C11.2
pads on no net: IC1.4 P1.0 P1.3 P1.4 P1.5 P1.S P2.0 P2.3 P2.4 P2.5 P2.S P3.0 P3.5 P3.S P4.0 P4.5 P4.S P9.2 P9.4

## Polygon pours and split planes (outlines as drawn)
BATT_GND on Bottom Layer "BOT" (solid, pour order 4): 63.4,2 4.34,2 cw(c4.34,4.54) 1.8,4.54 1.8,22.9 1.8,75.76 cw(c4.34,75.76) 4.34,78.3 24,78.3 65.46,78.3 cw(c65.46,75.76) 68,75.76 68,48.3 68,4.54 cw(c65.46,4.54) 65.46,2 62.5,2
BATT_GND on Top Layer "TOP" (solid, pour order 3): 63.4,2 4.34,2 cw(c4.34,4.54) 1.8,4.54 1.8,22.9 1.8,75.76 cw(c4.34,75.76) 4.34,78.3 24,78.3 65.46,78.3 cw(c65.46,75.76) 68,75.76 68,48.3 68,4.54 cw(c65.46,4.54) 65.46,2 62.5,2

## Silkscreen, mask and mechanical layers (free items; w line width, h text height)
Top Overlay:
  lines w0.2: 1.46,50.3 2.26,50.3 ; 1.76,50.6 2.76,50.6 ; 1.96,50.9 2.56,50.9 ; 2.26,49.31 2.26,50.3 ; 3.06,50.3 2.26,50.3 ; 6.01,40.36 7,40.36 ; 7,39.56 7,40.36 ; 7,41.16 7,40.36 ; 7.3,39.86 7.3,40.86 ; 7.6,40.06 7.6,40.66 ; 35.9,41.46 35.9,42.06 ; 35.9,44 35.9,44.6 ; 36.2,41.26 36.2,42.26 ; 36.2,43.8 36.2,44.8 ; 36.5,40.96 36.5,41.76 ; 36.5,42.56 36.5,41.76 ; 36.5,43.5 36.5,44.3 ; 36.5,45.1 36.5,44.3 ; 37.49,41.76 36.5,41.76 ; 37.49,44.3 36.5,44.3 ; 51.17,23.58 52.16,23.58 ; 52.16,22.78 52.16,23.58 ; 52.16,24.38 52.16,23.58 ; 52.46,23.08 52.46,24.08 ; 52.76,23.28 52.76,23.88
  lines w0.4: 2.9,42.1 3.3,41.7 6.2,41.7 ; 3.1,44.5 3.4,44.2 6.2,44.2 ; 6.01,42.96 6.8,42.96 ; 6.01,45.5 6.8,45.5
  text "ShuntOut1" at 7.6,64.8 h0.6
  text "ShuntOut3" at 56.7,64.8 h0.6
  text "Reset" at 7.6,50.2 h0.6 r90
  text "3V3" at 19.2,49.86 h0.6
  text "PosSense" at 39.5,46.1 h0.6
  text "Tx" at 7.5,45.2 h0.6
  text "Reset" at 6.6,43.9 h0.6
  text "Rx" at 7.6,42.7 h0.6
  text "Boot" at 6.6,41.5 h0.6
  text "ShuntOut" at 39.5,39.3 h0.6
  text "3V3" at 6.6,38.96 h0.6
  text "ShuntOut3" at 37.493,37.468 h0.6
  text "Button1" at 61.4,23.2 h0.6
  text "GNDSw" at 54.7,20.9 h0.6
  text "BTNSw" at 58.8,20.9 h0.6
  text "Button3" at 8.5,14.8 h0.6
  text "Button2" at 57.3,14.6 h0.6
Bottom Overlay:
  rectangle: 29.7,34.4 30.3,35.2
  rectangle: 29.7,40.5 30.3,41.3
  lines w0.4: 24.6,35.3 25.7,35.3 ; 24.6,41.4 25.7,41.4 ; 25.1,34.8 25.1,35.9 ; 25.1,40.9 25.1,42
Mechanical 1:
  the board outline again, w0.4